# Altium PCB GasLevelSafety.PcbDoc
Units mm, origin at the board's own origin, x right, y up, seen from the top; angles counter-clockwise.
Board outline 80 x 100 mm, 2 copper layers (Top Layer, Bottom Layer); 30 components, 23 nets, 118 pads, 0 vias.
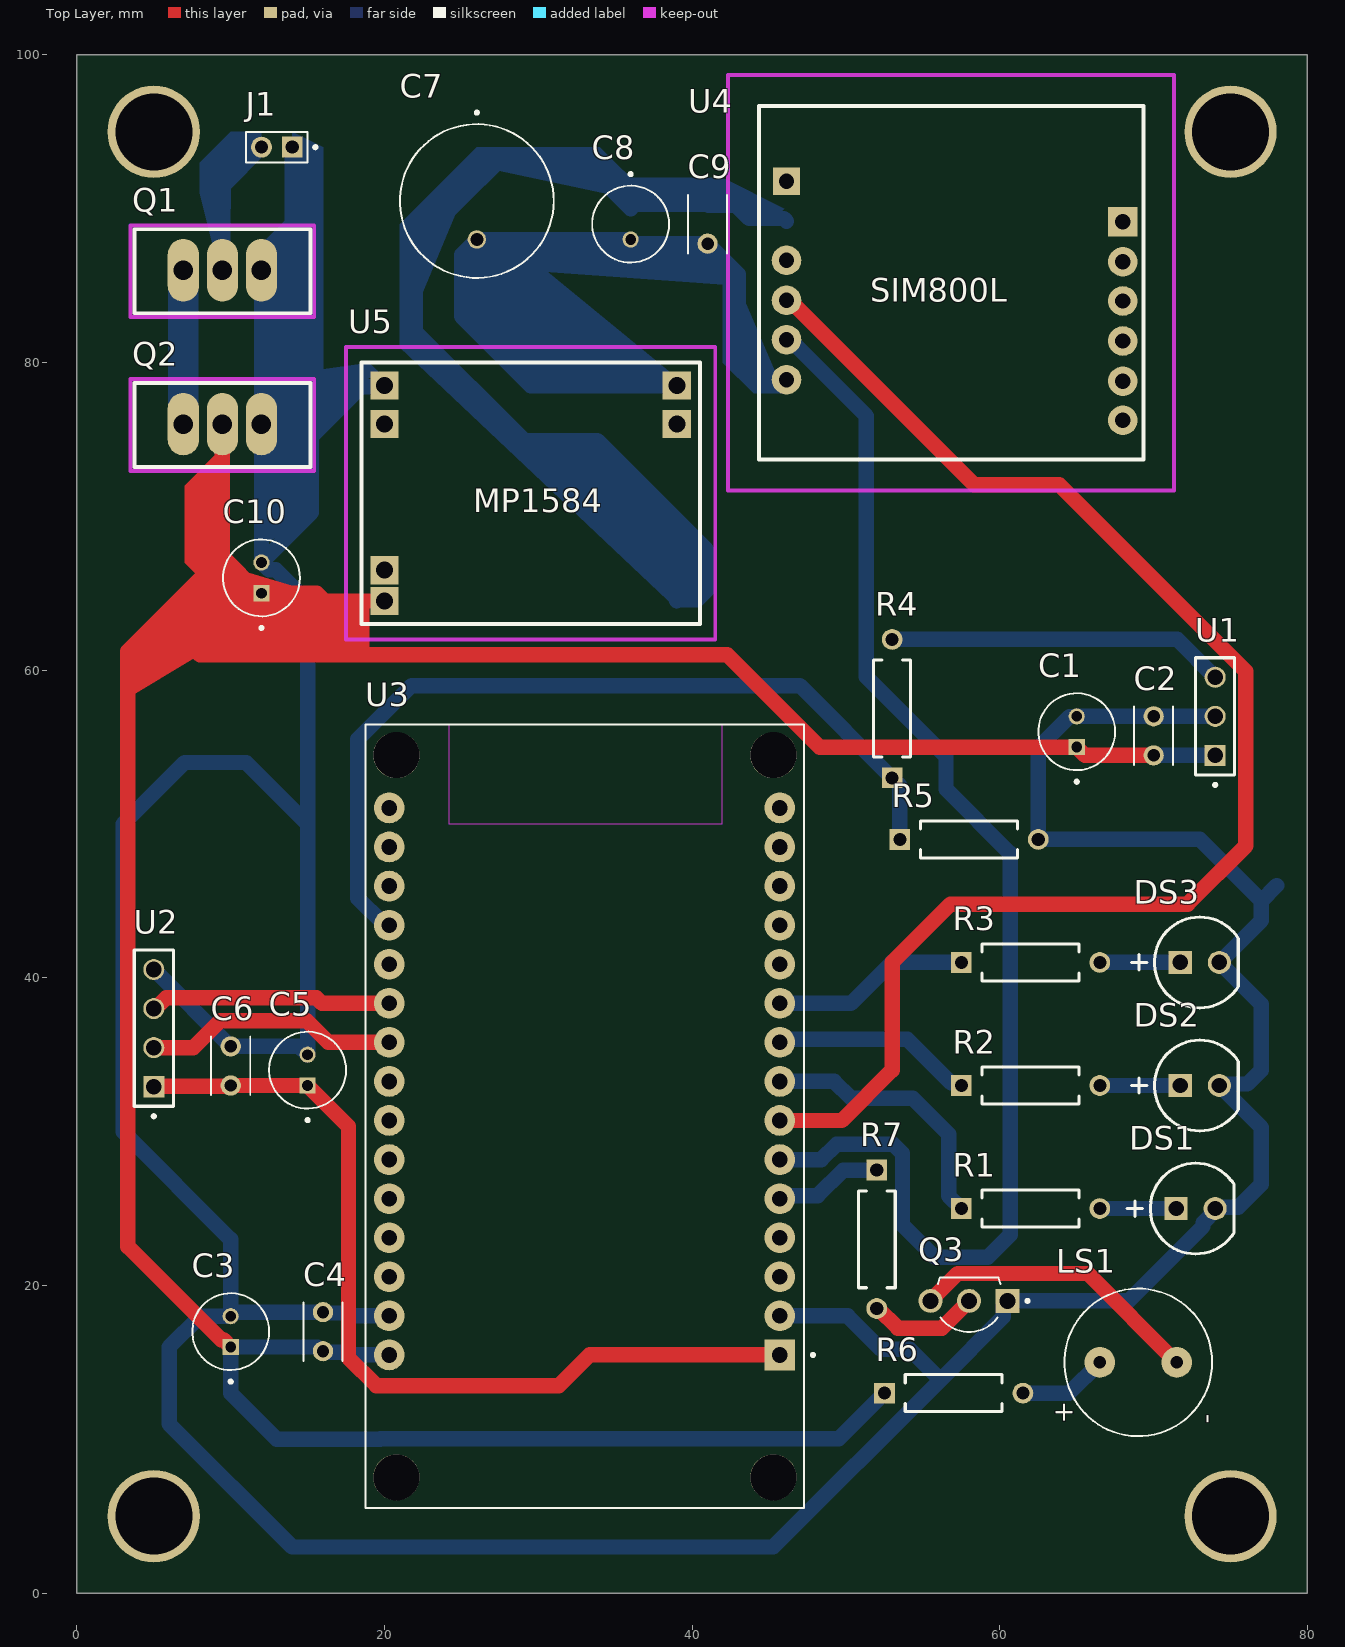
[diagram p0: Top Layer view]
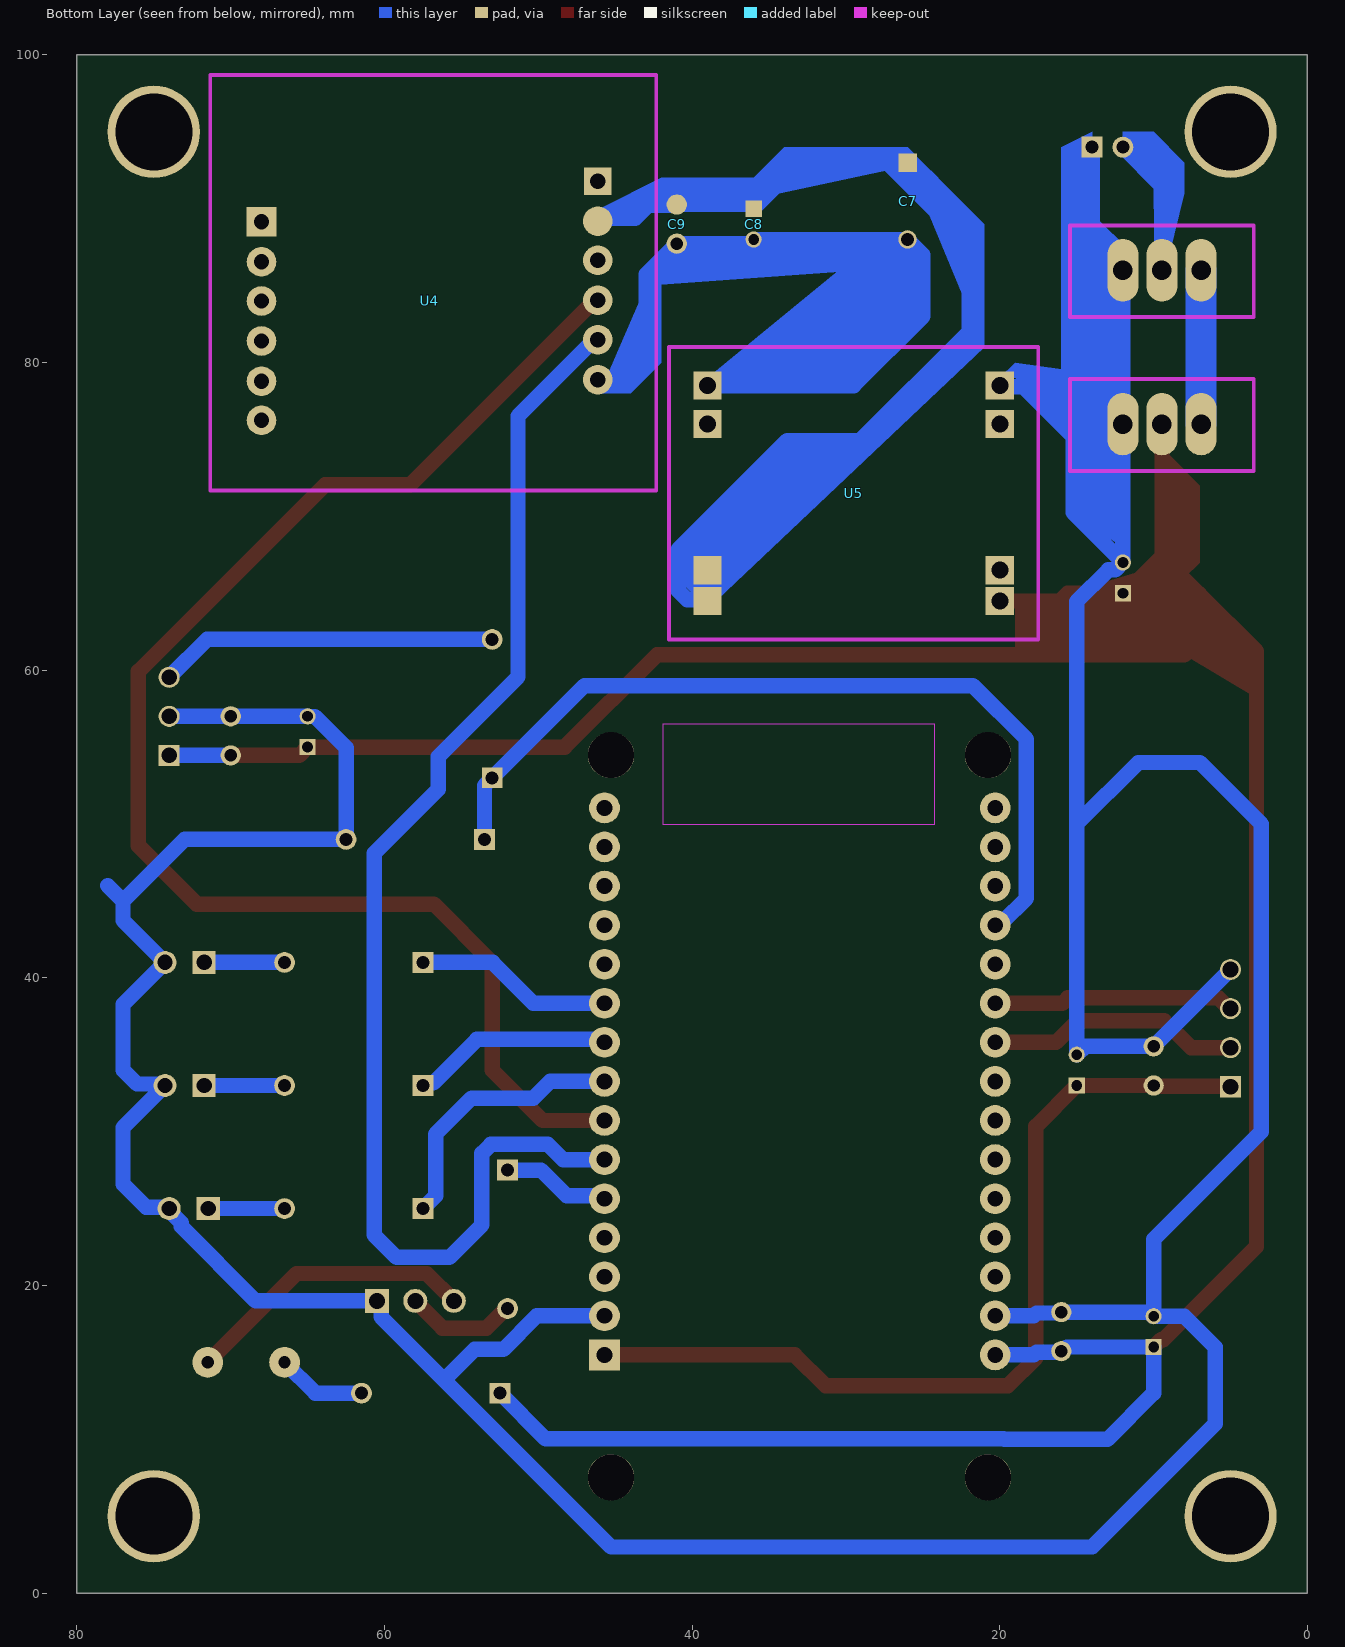
[diagram p1: Bottom Layer view, seen from below]
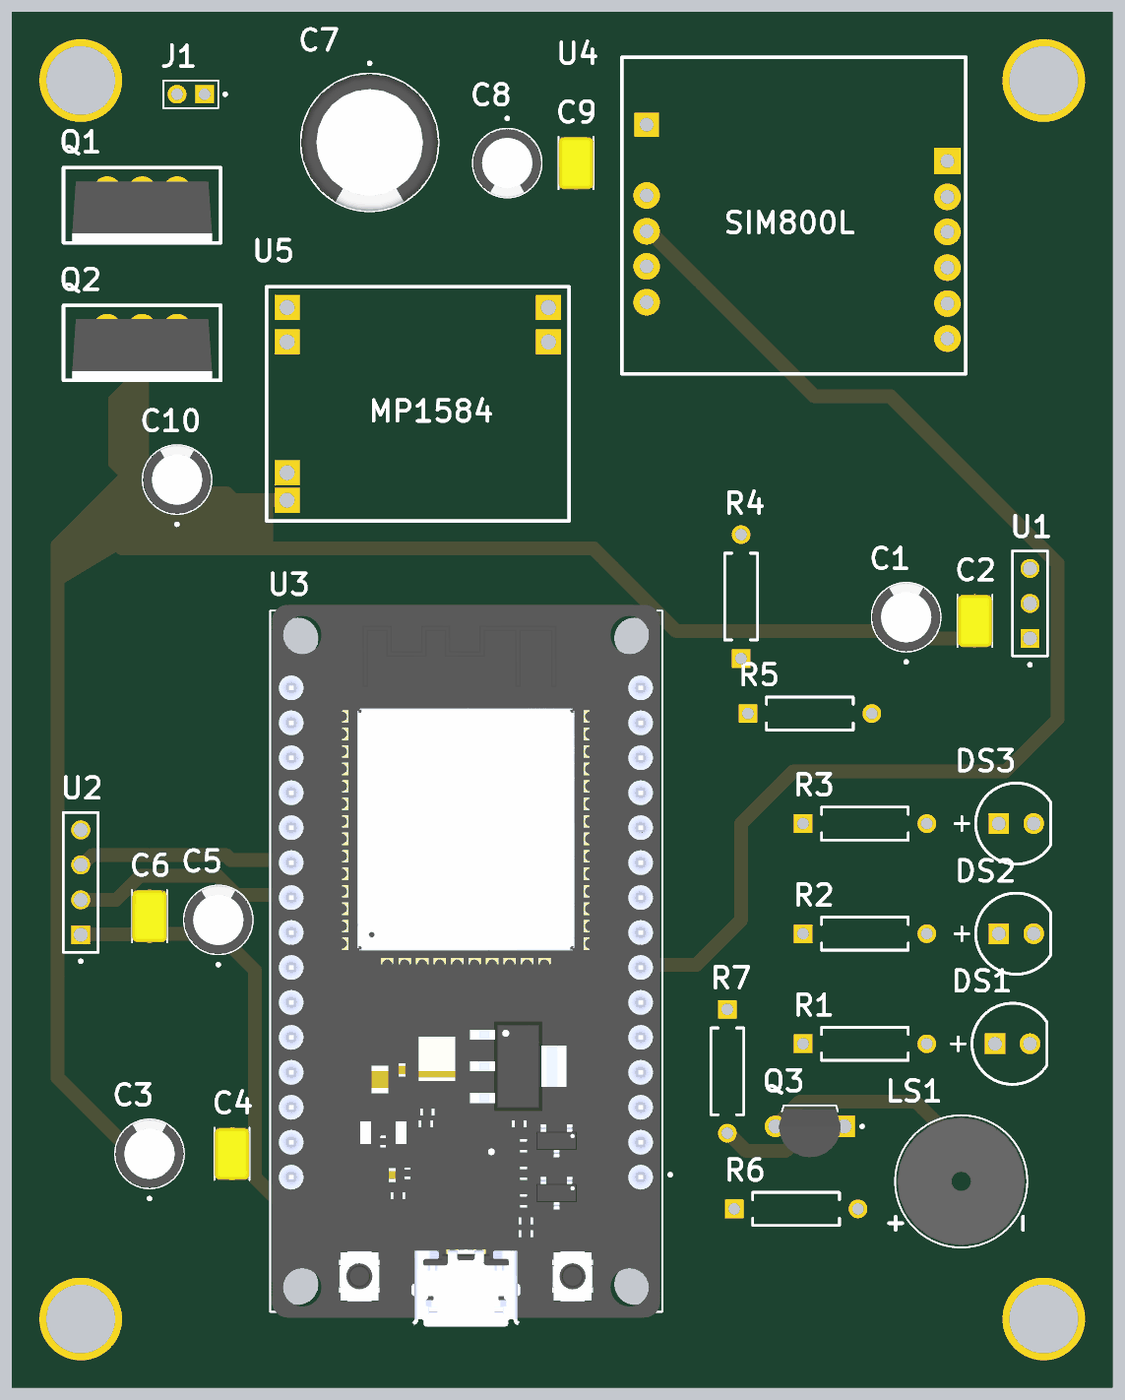
[diagram p2: 3D render of the assembled board from above, using the file's embedded part models]

## Layer stack, top to bottom
Top Solder: solder mask 0.0102, Solder Resist, Dk 3.5
Top Layer: signal copper 0.0356
Dielectric 1: dielectric 0.32, FR-4, Dk 4.8
Bottom Layer: signal copper 0.0356
Bottom Solder: solder mask 0.0102, Solder Resist, Dk 3.5

## Board outline
0,0 0,100 80,100 80,0

## Design rules (kind name [scope] priority, off if disabled: settings)
Clearance [All] p1: gap=0.5 ignorepadtopadclearanceinfootprint=TRUE
PolygonConnect [All] p1: connectstyle=Direct reliefconductorwidth=0.254 reliefentries=4 polygonreliefangle="45 Angle" airgapwidth=0.254
RoutingVias [All] p1: holewidth=0.711 width=1.27 viastyle="Through Hole" minholewidth=0.711 minwidth=1.27 maxholewidth=0.711 maxwidth=1.27
SolderMaskExpansion [All] p1: expansion=0 istentingtop=FALSE
SupplyNets "Schematic Supply Nets_1" [InNet('GND')] p1: voltage=0.000
SupplyNets "Schematic Supply Nets" [InNet('5V')] p2: voltage=0.000
Width [All] p1: maxlimit=2 minlimit=1 preferedwidth=1
30 further rules are at their usual default settings.

## Components (designator, comment, footprint, x,y, rotation, side; value= is the part's Value field where it differs from the comment)
C1 "" CAPPRD200W45D500H500#1 65,56 r90 top value="470uF 10V"
C2 "C315C104K5R5TA" CAPRR254W54L381T254H466B#1 70,55.73 r270 top value="100nF 10V"
C3 "" CAPPRD200W45D500H500#1 10,17 r90 top value="470uF 10V"
C4 "C315C104K5R5TA" CAPRR254W54L381T254H466B#1 16,17 r270 top value="100nF 10V"
C5 "" CAPPRD200W45D500H500#1 15,34 r90 top value="10uF 10V"
C6 "C315C104K5R5TA" CAPRR254W54L381T254H466B#1 10,34.27 r270 top value="100nF 10V"
C7 "EEUFS1V102LB" CAPPRD500W60D1000H2500 26,90.5 r270 top value="1000uF 25V"
C8 "" CAPPRD200W45D500H500#2 36,89 r270 top value="10uF 10V"
C9 "C315C104K5R5TA" CAPRR254W54L381T254H466B#2 41,89 r90 top value="100nF 10V"
C10 "" CAPPRD200W45D500H500#1 12,66 r90 top value="470uF 10V"
DS1 "Green" CGX-G502DC 72.73,25 r0 top
DS2 "Yellow" CGX-G502DC 73,33 r0 top
DS3 "Red" CGX-G502DC 73,41 r0 top
J1 "M22-2510246" HARWIN_M22-2510246 13,94 r180 top
LS1 "CMI-9605IC-0580T" CUI_CMI-9605IC-0580T 69,15 r90 top
Q1 "DIP-MOSFET-P-CH-60V-27A(TO-220)" TO-220 9.46,85.492 r180 top value=IRF4905
Q2 "DIP-MOSFET-P-CH-60V-27A(TO-220)" TO-220 9.46,75.492 r180 top value=IRF4905
Q3 "S8050-D-AP" TO92250P457H470-3B 58,19 r180 top
R1 "MFR-25FBF52-221R" RESA60-630X240 62,25 r0 top value=221
R2 "MFR-25FBF52-221R" RESA60-630X240 62,33 r0 top value=221
R3 "MFR-25FBF52-221R" RESA60-630X240 62,41 r0 top value=221
R4 "MFR-25FBF52-1K" RESA60-630X240 53,57.5 r90 top value=1k
R5 "MFR-25FBF52-2K21" RESA60-630X240 58,49 r0 top value=2.21k
R6 "MFR-25FBF52-10K" RESA60-630X240 57,13 r0 top value=10
R7 "MFR-25FBF52-1K" RESA60-630X240 52,23 r270 top value=1k
U1 "TSW-103-08-L-S-LL" SAMTEC_TSW-103-08-L-S-LL 74,54.46 r90 top value=MQ06
U2 "TSW-104-13-G-S" SAMTEC_TSW-104-13-G-S 5,32.92 r90 top value=HX711
U3 "ESP32-DEVKIT-V1" MODULE_ESP32_DEVKIT_V1 33,31 r180 top
U4 "SIM800L" SIM800L 44.333,73.689 r0 top
U5 "BUCK MP1584" MP1584 18.5,63 r0 top

## Footprints (in the part's own frame and the unit in brackets; to place one, negate y for a bottom-side part, rotate by r counter-clockwise, add the part's x,y. Pads: shape width x height; smd on the part's side, far side on the other; paste and mask are expansions set on the pad)
CAPPRD200W45D500H500#1 [mm]
  round 1.05 hole 0.7: N(1,0)
  rect 1.05x1.05 hole 0.7: P(-1,0)
  silkscreen extent -3.35,-2.5 2.5,2.5, body extent -2.5,-2.5 2.5,2.5, height 5
CAPPRD200W45D500H500#2 [mm]
  round 1.05 hole 0.7: N(1,0)
  rect 1.05x1.05 smd far side: P(-1,0)
  silkscreen extent -3.35,-2.5 2.5,2.5, body extent -2.5,-2.5 2.5,2.5, height 5
CAPPRD500W60D1000H2500 [mm]
  round 1.2 hole 0.85: N(2.5,0)
  rect 1.2x1.2 smd far side: P(-2.5,0)
  silkscreen extent -5.85,-5 5,5, body extent -5,-5 5,5, height 25
CAPRR254W54L381T254H466B#1 [mm]
  round 1.318 hole 0.81: 1(-1.27,0) 2(1.27,0)
  silkscreen extent -1.91,-1.27 1.91,1.27, body extent -1.91,-1.27 1.91,1.27, height 3.14
CAPRR254W54L381T254H466B#2 [mm]
  round 1.318 hole 0.81: 1(-1.27,0)
  round 1.318 smd far side: 2(1.27,0)
  silkscreen extent -1.91,-1.27 1.91,1.27, body extent -1.91,-1.27 1.91,1.27, height 3.14
CGX-G502DC [mm] "THD, 2-Leads, Dia 5.9mm, Pin Spacing 2.54mm"
  rect 1.5x1.5 hole 1: 1(-1.27,0)
  round 1.5 hole 1: 2(1.27,0)
  silkscreen extent -4.45,-2.95 2.5,2.95, body extent -2.95,-2.95 2.5,2.95, height 9.1
CUI_CMI-9605IC-0580T [mm]
  round 2 hole 0.8: N(0,-2.5) P(0,2.5)
  silkscreen extent -4.8,-4.8 4.8,4.8, body extent -4.8,-4.8 4.8,4.8
HARWIN_M22-2510246 [mm]
  rect 1.358x1.358 / inner round 1.358 / far side rect 1.358x1.358 hole 0.85: 1(-1,0)
  round 1.358 hole 0.85: 2(1,0)
  silkscreen extent -2.6,-1 2,1
MODULE_ESP32_DEVKIT_V1 [mm]
  rect 2x2 / inner round 2 / far side rect 2x2 hole 1.02: 1(-12.7,15.515)
  round 2 hole 1.02: 2(-12.7,12.975) 3(-12.7,10.435) 4(-12.7,7.895) 5(-12.7,5.355) 6(-12.7,2.815) 7(-12.7,0.275) 8(-12.7,-2.265) 9(-12.7,-4.805) 10(-12.7,-7.345) 11(-12.7,-9.885) 12(-12.7,-12.425) 13(-12.7,-14.965) 14(-12.7,-17.505) 15(-12.7,-20.045) 16(12.7,-20.045) 17(12.7,-17.505) 18(12.7,-14.965) 19(12.7,-12.425) 20(12.7,-9.885) 21(12.7,-7.345) 22(12.7,-4.805) 23(12.7,-2.265) 24(12.7,0.275) 25(12.7,2.815) 26(12.7,5.355) 27(12.7,7.895) 28(12.7,10.435) 29(12.7,12.975) 30(12.7,15.515)
  round 3 hole 3 unplated: ""(-12.28,23.475) ""(-12.28,-23.475) ""(12.23,23.475) ""(12.23,-23.475)
  Keep-Out Layer region: 8.78,-25.475 -8.91,-25.475 -8.91,-18.985 8.78,-18.985
  Keep-Out Layer region: 8.78,-25.475 -8.91,-25.475 -8.91,-18.985 8.78,-18.985
  silkscreen extent -14.95,-25.48 14.23,25.48, body extent -14.1,-25.9 14.1,26.55, height 7.05
MP1584 [mm]
  rect 1.831x1.831 hole 1.1: 1(1.5,15.5) 2(1.5,13) 3(1.5,3.5) 7(20.5,13) 8(20.5,15.5)
  rect 1.831x1.831 hole 1.1 paste-2539.97: 4(1.5,1.5)
  rect 1.831x1.831 smd far side: 5(20.5,1.5) 6(20.5,3.5)
  Keep-Out Layer lines w0.254: -1,-1 -1,18 23,18 23,-1 -1,-1
  silkscreen extent 0,0 22,17
RESA60-630X240 [mm] "Axial Resistor, 2-Leads, Dia 2.4mm, Body Length 6.3mm"
  rect 1.35x1.35 hole 0.85: 1(-4.5,0)
  round 1.35 hole 0.85: 2(4.5,0)
  silkscreen extent -3.15,-1.2 3.15,1.2, body extent -4.77,-1.19 4.77,1.2, height 2.4
SAMTEC_TSW-103-08-L-S-LL [mm]
  rect 1.37x1.37 hole 1.02: 01(0,0)
  round 1.37 hole 1.02: 02(2.54,0) 03(5.08,0)
  silkscreen extent -2.02,-1.27 6.35,1.27
SAMTEC_TSW-104-13-G-S [mm]
  rect 1.37x1.37 hole 1.02: 01(0,0)
  round 1.37 hole 1.02: 02(2.54,0) 03(5.08,0) 04(7.62,0)
  silkscreen extent -2.02,-1.27 8.89,1.27
SIM800L [mm]
  rect 1.769x1.769 hole 1: 1(1.8,18.1)
  round 1.924 smd far side: 2(1.8,15.5)
  round 1.924 hole 1: 3(1.8,12.955) 4(1.8,10.356) 5(1.8,7.8) 6(1.8,5.2) 7(23.667,2.556) 8(23.667,5.104) 9(23.667,7.712) 10(23.667,10.311) 11(23.667,12.856)
  rect 1.924x1.924 hole 1: 12(23.667,15.456)
  Keep-Out Layer lines w0.254: -2,-2 27,-2 27,25 -2,25 -2,-2
  silkscreen extent 0,0 25,23
TO92250P457H470-3B [mm]
  rect 1.56x1.56 / inner round 1.56 / far side rect 1.56x1.56 hole 1.04: 1(-2.5,0)
  round 1.56 hole 1.04: 2(0,0) 3(2.5,0)
  silkscreen extent -3.9,-1.53 2.03,2.02, body extent -2.25,-1.25 2.25,2.25, height 4.7
TO-220 [mil]
  oval 80x160 hole 50: 1(-100,-20) 2(0,-20) 3(100,-20)
  Keep-Out Layer lines w10: 235,100 235,-135 -235,-135 -235,100 235,100
  silkscreen extent -225,-125 225,90, body extent -200,-86 200,86, height 803

## Part data
C1 C3 C5 C8 C10: library part ECEA1HKS4R7, "Capacitor; Aluminum Electrolytic; Cap 4.7uF; Vol-Rtg 50V; Radial; Ks; Height 5mm", Package="RADIAL-2 Panasonic", Availability="In Stock", Check_prices=https://www.snapeda.com/parts/ECE-A1HKS4R7/Panasonic/view-part/2302906/?ref=eda, MF=Panasonic, MP=ECE-A1HKS4R7, Price=None, SnapEDA_Link=https://www.snapeda.com/parts/ECE-A1HKS4R7/Panasonic/view-part/2302906/?ref=snap
C2 C4 C6 C9: "Capacitor, Ceramic, 100nF, 50VDC, 10-% Tol, 10+% Tol, X7R-TC Code, -15, 15%-TC", Package="RADIAL-2 KEMET", Check_prices=https://www.snapeda.com/parts/C315C104K5R5TA/KEMET/view-part/?ref=eda, MF=KEMET, MP=C315C104K5R5TA, SnapEDA_Link=https://www.snapeda.com/parts/C315C104K5R5TA/KEMET/view-part/?ref=snap
C7: "CAP ALUM 1000UF 20% 35V RADIAL", Package="RADIAL-2 Panasonic", Availability="In Stock", Check_prices=https://www.snapeda.com/parts/EEU-FS1V102LB/Panasonic/view-part/6221050/?ref=eda, MF="Panasonic Electronic Components", MP=EEU-FS1V102LB, Price=None, Purchase-URL=https://pricing.snapeda.com/search/part/EEU-FS1V102LB/?ref=eda, SnapEDA_Link=https://www.snapeda.com/parts/EEU-FS1V102LB/Panasonic/view-part/6221050/?ref=snap
DS1 DS2 DS3: library part CMP-007-00008-2, "Green LED, 80 mW, 20 mA, -25 to 85 degC, 2-Pin THD", Case/Package=G502DC, Manufacturer="Shenzhen CGX", Package Description="2-Pin Through Hole Device, Dia 5.9 mm", Datasheet URL=http://datasheet.octopart.com/G502DC-Chengguangxing-datasheet-62330340.pdf, Datasheet Version=Sep-14, Manufacturer URL=http://szcgx.com/, Mounting Technology=TH, Package Reference=G502DC, RoHS Compliant=Unknown
J1: "2.00mm (0.079) Pitch SIL Vertical 2.4mm Throughboard Pin Header, 3.5mm mating pin height, tin, 2 contacts", Package=None, Check_prices=https://www.snapeda.com/parts/M22-2510246/Harwin/view-part/?ref=eda, MF=Harwin, MP=M22-2510246, SnapEDA_Link=https://www.snapeda.com/parts/M22-2510246/Harwin/view-part/?ref=snap
LS1: "9.6 mm, 5 Vdc, 80 dB, Through Hole, Driving Circuit, Magnetic Audio Indicator Buzzer", Package=Package, Check_prices=https://www.snapeda.com/parts/CMI-9605IC-0580T/Same+Sky/view-part/?ref=eda, MF="Same Sky", MP=CMI-9605IC-0580T, SnapEDA_Link=https://www.snapeda.com/parts/CMI-9605IC-0580T/Same+Sky/view-part/?ref=snap
Q1 Q2: "IRF4905 P-Channel MOSFET 55V 74A 200W (TO-220)", Package="TO-220-3 ON", Check_prices=https://www.snapeda.com/parts/FQP27P06/Onsemi/view-part/?ref=eda, MF="ON Semiconductor", MP=FQP27P06, SnapEDA_Link=https://www.snapeda.com/parts/FQP27P06/Onsemi/view-part/?ref=snap
Q3: "Bipolar (BJT) Transistor NPN 25 V 500 mA 150MHz 625 mW Through Hole TO-92", Package="TO-92 MCC", Check_prices=https://www.snapeda.com/parts/S8050-D-AP/Micro+Commercial/view-part/?ref=eda, MF="Micro Commercial Co", MP=S8050-D-AP, SnapEDA_Link=https://www.snapeda.com/parts/S8050-D-AP/Micro+Commercial/view-part/?ref=snap
R1 R2 R3: library part CMP-009-00051-4, "Axial Resistor, 221 Ohm, +/- 1%, 250 mW, -55 to 155 degC, 2-Pin THD, RoHS, Bulk", Case/Package=Axial, Manufacturer=Yageo, Max Operating Temperature=155°C, Min Operating Temperature=-55°C, Package Description="2-Pin Axial Lead, Dia 2.4 mm, Body Length 6.3 mm", Package Quantity=200, Package Reference=MFR-25, Power=250mW, Tolerance=1%, Voltage Rating=250V, Datasheet URL=http://www.yageo.com/documents/recent/Yageo%20LR_MFR_2013.pdf, Datasheet Version=Apr-13, Manufacturer URL=http://www.yageo.com/, Mounting Technology=TH, Packaging=Bulk, RoHS Compliant=True
R4 R7: library part CMP-009-00048-4, "Axial Resistor, 1 KOhm, +/- 1%, 250 mW, -55 to 155 degC, 2-Pin THD, RoHS, Bulk", Case/Package=Axial, Manufacturer=Yageo, Max Operating Temperature=155°C, Min Operating Temperature=-55°C, Package Description="2-Pin Axial Lead, Dia 2.4 mm, Body Length 6.3 mm", Package Quantity=200, Package Reference=MFR-25, Power=250mW, Tolerance=1%, Voltage Rating=250V, Composition=CarbonFilm, Datasheet URL=http://www.yageo.com/documents/recent/Yageo%20LR_MFR_2013.pdf, Datasheet Version=Apr-13, Manufacturer URL=http://www.yageo.com/, Mounting Technology=TH, Packaging=Bulk, RoHS Compliant=True
R5: library part CMP-009-00054-4, "Axial Resistor, 2.21 KOhm, +/- 1%, 0.25 W, -55 to 155 degC, 2-Pin THD, RoHS, Bulk", Case/Package=Axial, Manufacturer=Yageo, Max Operating Temperature=155°C, Min Operating Temperature=-55°C, Package Description="2-Pin Axial Lead, Dia 2.4 mm, Body Length 6.3 mm", Package Quantity=200, Package Reference=MFR-25, Power=250mW, Tolerance=1%, Voltage Rating=250V, Datasheet URL=http://www.yageo.com/documents/recent/Yageo%20LR_MFR_2013.pdf, Datasheet Version=Apr-13, Manufacturer URL=http://www.yageo.com/, Mounting Technology=TH, Packaging=Bulk, RoHS Compliant=True
R6: library part CMP-009-00047-4, "Axial Resistor, 10 KOhm, +/- 1%, 0.25 W, -55 to 155 degC, 2-Pin THD, RoHS, Bulk", Case/Package=Axial, Manufacturer=Yageo, Max Operating Temperature=155°C, Min Operating Temperature=-55°C, Package Description="2-Pin Axial Lead, Dia 2.4 mm, Body Length 6.3 mm", Package Quantity=200, Package Reference=MFR-25, Power=250mW, Tolerance=1%, Voltage Rating=250V, Datasheet URL=http://www.yageo.com/documents/recent/Yageo%20LR_MFR_2013.pdf, Datasheet Version=Apr-13, Manufacturer URL=http://www.yageo.com/, Mounting Technology=TH, Packaging=Bulk, RoHS Compliant=True
U1 U2: Package=None, Availability=Unavailable, Price=None
  U1: MP=TSW-103-08-L-S-LL
  U2: MP=TSW-104-13-G-S
U3: "Dual core, Wi-Fi: 2.4 GHz up to 150 Mbits/s,BLE (Bluetooth Low Energy) and legacy Bluetooth, 32 bits, Up to 240 MHz", Package=None, Check_prices=https://www.snapeda.com/parts/ESP32-DEVKIT-V1/Do+it/view-part/?ref=eda, MF="Do it", MP=ESP32-DEVKIT-V1, SnapEDA_Link=https://www.snapeda.com/parts/ESP32-DEVKIT-V1/Do+it/view-part/?ref=snap
U4 U5: library part Component_1

## Free pads (board coordinates)
  round 6 hole 5: 1(5,95) 2(5,5) 3(75,5) 4(75,95)

## Nets (pads, with @x,y where several pads share a name; then routed paths per layer and width w, separated by ;. In a path a pad name is that pad's centre, name@x,y a point inside that pad or via, vN(x,y) a via of type N, cw(c..) or ccw(c..) an arc to the next point about the centre after c; other vN are vias at no path point)
5V: C1.P C2.2 C3.P C4.2 C10.P Q2.2 R6.1 U1.01 U3.30 U5.4 | length 208.7
  Top Layer w1: Q2.2 9.46,67.383 ; C3.P 9.525,16.475 9.368,16.475 3.315,22.528 3.315,61.238 7.038,64.962 ; U5.4 16.097,64.5 15.597,65 C10.P 11.975,65.025 11.818,65.025 9.46,67.383 ; C2.2 65.54,54.46 C1.P 48.291,55 42.291,61 8,61 7,62 7,64.923 7.038,64.962 ; 7.038,64.962 9.46,67.383
  Bottom Layer w1: U3.30 17.8,15.485 17.616,15.669 16.061,15.669 C4.2 15.914,15.73 15.644,16 C3.P 10,13 13,10 19.709,10 19.734,10.025 49.525,10.025 R6.1 ; C2.2 U1.01
Buzzer: R7.1 U3.5 | length 7.1
  Bottom Layer w1: U3.5 45.891,25.836 48.161,25.836 49.825,27.5 R7.1
GasLow: R2.1 U3.9 | length 13.1
  Bottom Layer w1: U3.9 45.891,35.996 46.598,35.996 46.602,36 54,36 56.825,33.175 57.325,33.175 R2.1
GasSensor: R4.1 R5.1 U3.19 | length 56
  Bottom Layer w1: U3.19 20.109,43.616 19.82,43.616 18.27,45.167 18.27,55.511 21.759,59 47,59 R4.1 53.5,52.5 R5.1
GND: C1.N C2.1 C3.N C4.1 C5.N C6.1 C10.N DS1.2 DS2.2 DS3.2 J1.1 Q1.1 Q2.1 Q3.1 R5.2 U1.02 U2.04 U3.2 U3.29 U5.1 | length 316.9
  Bottom Layer w1: U2.04 C6.1 14.446,35.54 14.986,35 C5.N 15,50 ; J1.1 14,89.016 12,87.016 Q1.1 Q2.1 C10.N ; 15,70.014 15.236,70.25 ; U5.1 19.916,78.416 18.463,78.416 15.236,75.189 15.236,70.25 ; U3.29 17.8,18.025 17.616,18.209 16.061,18.209 C4.1 10.284,18.27 10.014,18 C3.N ; U3.2 50.106,18.025 52.28,15.851 54.149,15.851 56.132,13.868 ; U1.02 C2.1 C1.N 64.99,56.99 64.526,56.99 62.5,54.964 R5.2 73,49 77,45 ; 78,46 77,45 ; C3.N 9.99,17.99 7.99,17.99 6,16 6,11 14,3 45.264,3 56.132,13.868 ; C3.N 10,23 3,30 3,50 7,54 11,54 15,50 ; C10.N 12.014,67 12.489,66.525 12.939,66.525 15,64.464 15,50 ; C10.N 12,67.014 15.236,70.25 ; 56.132,13.868 60.22,17.956 60.22,18.72 Q3.1 68.374,19 73.21,23.836 73.21,24.075 74,24.865 DS1.2 74.096,25.096 75.51,25.096 77,26.586 77,30.27 DS2.2 74.366,33.096 76.096,33.096 77,34 77,38.27 DS3.2 77,43.73 77,45
GSM_RX: U3.7 U4.4 | length 93
  Top Layer w1: U3.7 49.725,30.725 53,34 53,41 56.793,44.793 72.207,44.793 76,48.586 76,59.923 63.87,72.053 58.344,72.053 46.352,84.045 U4.4
GSM_TX: U3.6 U4.5 | length 86.1
  Bottom Layer w1: U3.6 48.389,28.185 49.379,29.175 53.089,29.175 53.675,28.589 53.675,23.939 55.789,21.825 59.211,21.825 60.675,23.289 60.675,48.089 56.5,52.264 56.5,54.386 51.325,59.561 51.325,76.525 46.361,81.489 U4.5
HX711_DT: U2.03 U3.21 | length 15.7
  Top Layer w1: U2.03 5.1,38 5.799,38.699 15.579,38.699 15.933,38.345 U3.21
HX711_SCK: U2.02 U3.22 | length 16.6
  Top Layer w1: U2.02 7.574,35.46 9.313,37.199 14.958,37.199 16.352,35.805 U3.22
HX711_VCC: C5.P C6.2 U2.01 U3.1 | length 58.5
  Top Layer w1: U2.01 5.04,32.96 9.96,32.96 C6.2 C5.P 17.659,30.341 17.659,15.298 19.472,13.485 31.336,13.485 33.336,15.485 U3.1
Leak: R3.1 U3.10 | length 12.9
  Bottom Layer w1: U3.10 50.32,38.345 52.975,41 R3.1
NetC7_N: C7.N C8.N C9.1 U4.6 U5.8 | length 48.5
  Bottom Layer w1: C8.N@36,87.975 31.059,87.975 31.034,88 C7.N 25,87 25,83 29.5,78.5 U5.8 ; C8.N 36.014,88 36.284,87.73 C9.1 43,85.73 43,80.172 44.172,79 46.022,79 U4.6
NetC7_P: C7.P C8.P C9.2 U4.2 U5.5 | length 64.2
  Bottom Layer w1: U5.5 39.085,64.585 40.33,64.585 40.916,65.17 40.916,67.83 33.83,74.915 29.085,74.915 22,82 22,89 C7.P 33,93 C8.P 36.27,90.27 C9.2 41.061,90.209 42.863,90.209 43.706,89.366 45.956,89.366 U4.2
NetDS1_1: DS1.1 R1.2 | length 5
  Bottom Layer w1: R1.2 DS1.1
NetDS2_1: DS2.1 R2.2 | length 5.2
  Bottom Layer w1: R2.2 DS2.1
NetDS3_1: DS3.1 R3.2 | length 5.2
  Bottom Layer w1: R3.2 DS3.1
NetJ1_2: J1.2 Q1.2 | length 9.1
  Bottom Layer w1: Q1.2 9.484,86.024 9.484,91.484 J1.2
NetLS1_N: LS1.N Q3.3 | length 19.1
  Top Layer w1: Q3.3 55.5,19.017 57.263,20.78 65.72,20.78 LS1.N
NetLS1_P: LS1.P R6.2 | length 5.8
  Bottom Layer w1: R6.2 64.5,13 LS1.P
NetQ1_3: Q1.3 Q2.3 | length 10
  Bottom Layer w2: Q2.3 Q1.3
NetQ3_2: Q3.2 R7.2 | length 7.3
  Top Layer w1: R7.2 52.095,18.5 53.375,17.22 56.237,17.22 58,18.983 Q3.2
NetR4_2: R4.2 U1.03 | length 22
  Bottom Layer w1: R4.2 71.54,62 U1.03
Normal: R1.1 U3.8 | length 17.6
  Bottom Layer w1: U3.8 49.235,33.265 50.325,32.175 54.332,32.175 56.675,29.832 56.675,25.825 R1.1
pads on no net: U3. U3.3 U3.4 U3.11 U3.12 U3.13 U3.14 U3.15 U3.16 U3.17 U3.18 U3.20 U3.23 U3.24 U3.25 U3.26 U3.27 U3.28 U4.1 U4.3 U4.7 U4.8 U4.9 U4.10 U4.11 U4.12 U5.2 U5.3 U5.6 U5.7

## Other copper
Top Layer:
  region net 5V: 3,60 3,60.923 4.157,62.081 4.738,61.5 7.5,61.5
  region net 5V: 8,61 3,61 3,58
  region net 5V: 3.315,61.238 5,62.923 5,63 7,63 9,61 8.662,60.662 8.298,60.662
  region net 5V: 9,74 7,72 7,67 8,66 10,66
  region net 5V: 7,62 6,62 5,63 6,64 7,64
  region net 5V: 19,64 19,61 7.5,61.5 7,65 9,67
Bottom Layer:
  rectangle net NetJ1_2: 8,91 9,92
  region net NetC7_N: 29,80 37,80 37,78 30,78
  region net NetC7_P: 39,91 41,91 40,90
  region net NetC7_P: 25,90 28,93 25,93 24,92 24,91
  region net NetC7_P: 25,90 24,89 24,91
  region net NetC7_P: 40,91 43,91 44,90 46,90 45,89
  region net NetC7_P: 25,93 26,94 34,94 37,91 40,91 39,90
  region net NetC7_P: 21,81 23,81 21,83
  region net NetC7_P: 21,81 21,89 25,93 26,93
  region net NetC7_P: 39,64 41,66 41,68 34,75 29.17,75 29.085,74.915 23,81 21,81 22,82 21,81
  region net NetC7_P: 46,90 44,90 43,91 42,92 41,92 42,92
  region net NetC7_P: 42,92 36,92 35,91 43,91
  region net GND: 16,82 16,80 15,80 13,82
  region net GND: 16,89 16,82 15,82 12,85
  region net GND: 16,81 12,85 12,80 16,76
  region net GND: 14,95 14,94 15,93 16,94
  region net GND: 12,87 13,86 13,79 12,78
  region net GND: 16,91 16,89 13,86 12,87
  region net GND: 14,94 16,94 16,91 15.984,91 14,89.016
  region net GND: 12,68 15,71 15,70
  region net GND: 12,79 12,68 14.25,70.25 15.236,70.25 15.236,75.236 19,79 20,79 19,80
  region net NetJ1_2: 11,95 12,95 12,94
  region net NetJ1_2: 9,91 10,92 9,93
  region net NetJ1_2: 8,91 9,90 9,87
  region net NetJ1_2: 8,91 9,90 10,90 10,92
  region net NetJ1_2: 12,94 11,95 10,95 8,93 8,91
  region net NetC7_N: 26,88 29,88 30,87 29,87
  region net NetC7_N: 43,84 42,85 42,86
  region net NetC7_N: 43,85 42,85 42,80 44,78 46,78
  region net NetC7_N: 29,86 29,88 41,88 43,86 43,85
  region net NetC7_N: 28,87.5 26.5,87.5 26,87
  region net NetC7_N: 25,84 28.5,87.5 25.5,87.5
  region net NetC7_N: 39,79 29,79 25,83 25,84 28,87 28,88

## Silkscreen, mask and mechanical layers (free items; w line width, h text height)
Mechanical 1:
  the board outline again, w0.254

## Text inside footprints (layer, text, board x,y; h text height)
LS1: Top Overlay "+" at 64.73,11 h1.27 r90; Top Overlay "-" at 73.99,11 h1.27 r90; Mechanical 13 "+" at 64.73,11 h1.27 r90; Mechanical 13 "-" at 73.99,11 h1.27 r90
U5: Top Overlay "MP1584" at 25.754,70.254 h1.52